# Altium PCB Inverter.PcbDoc (part 2 of 3)
Units mm, origin at the board's own origin, x right, y up, seen from the top; angles counter-clockwise.
Board outline 150 x 100 mm, 2 copper layers (Top Layer, Bottom Layer), stack 1.74 mm thick; 301 components, 198 nets, 1184 pads, 813 vias.
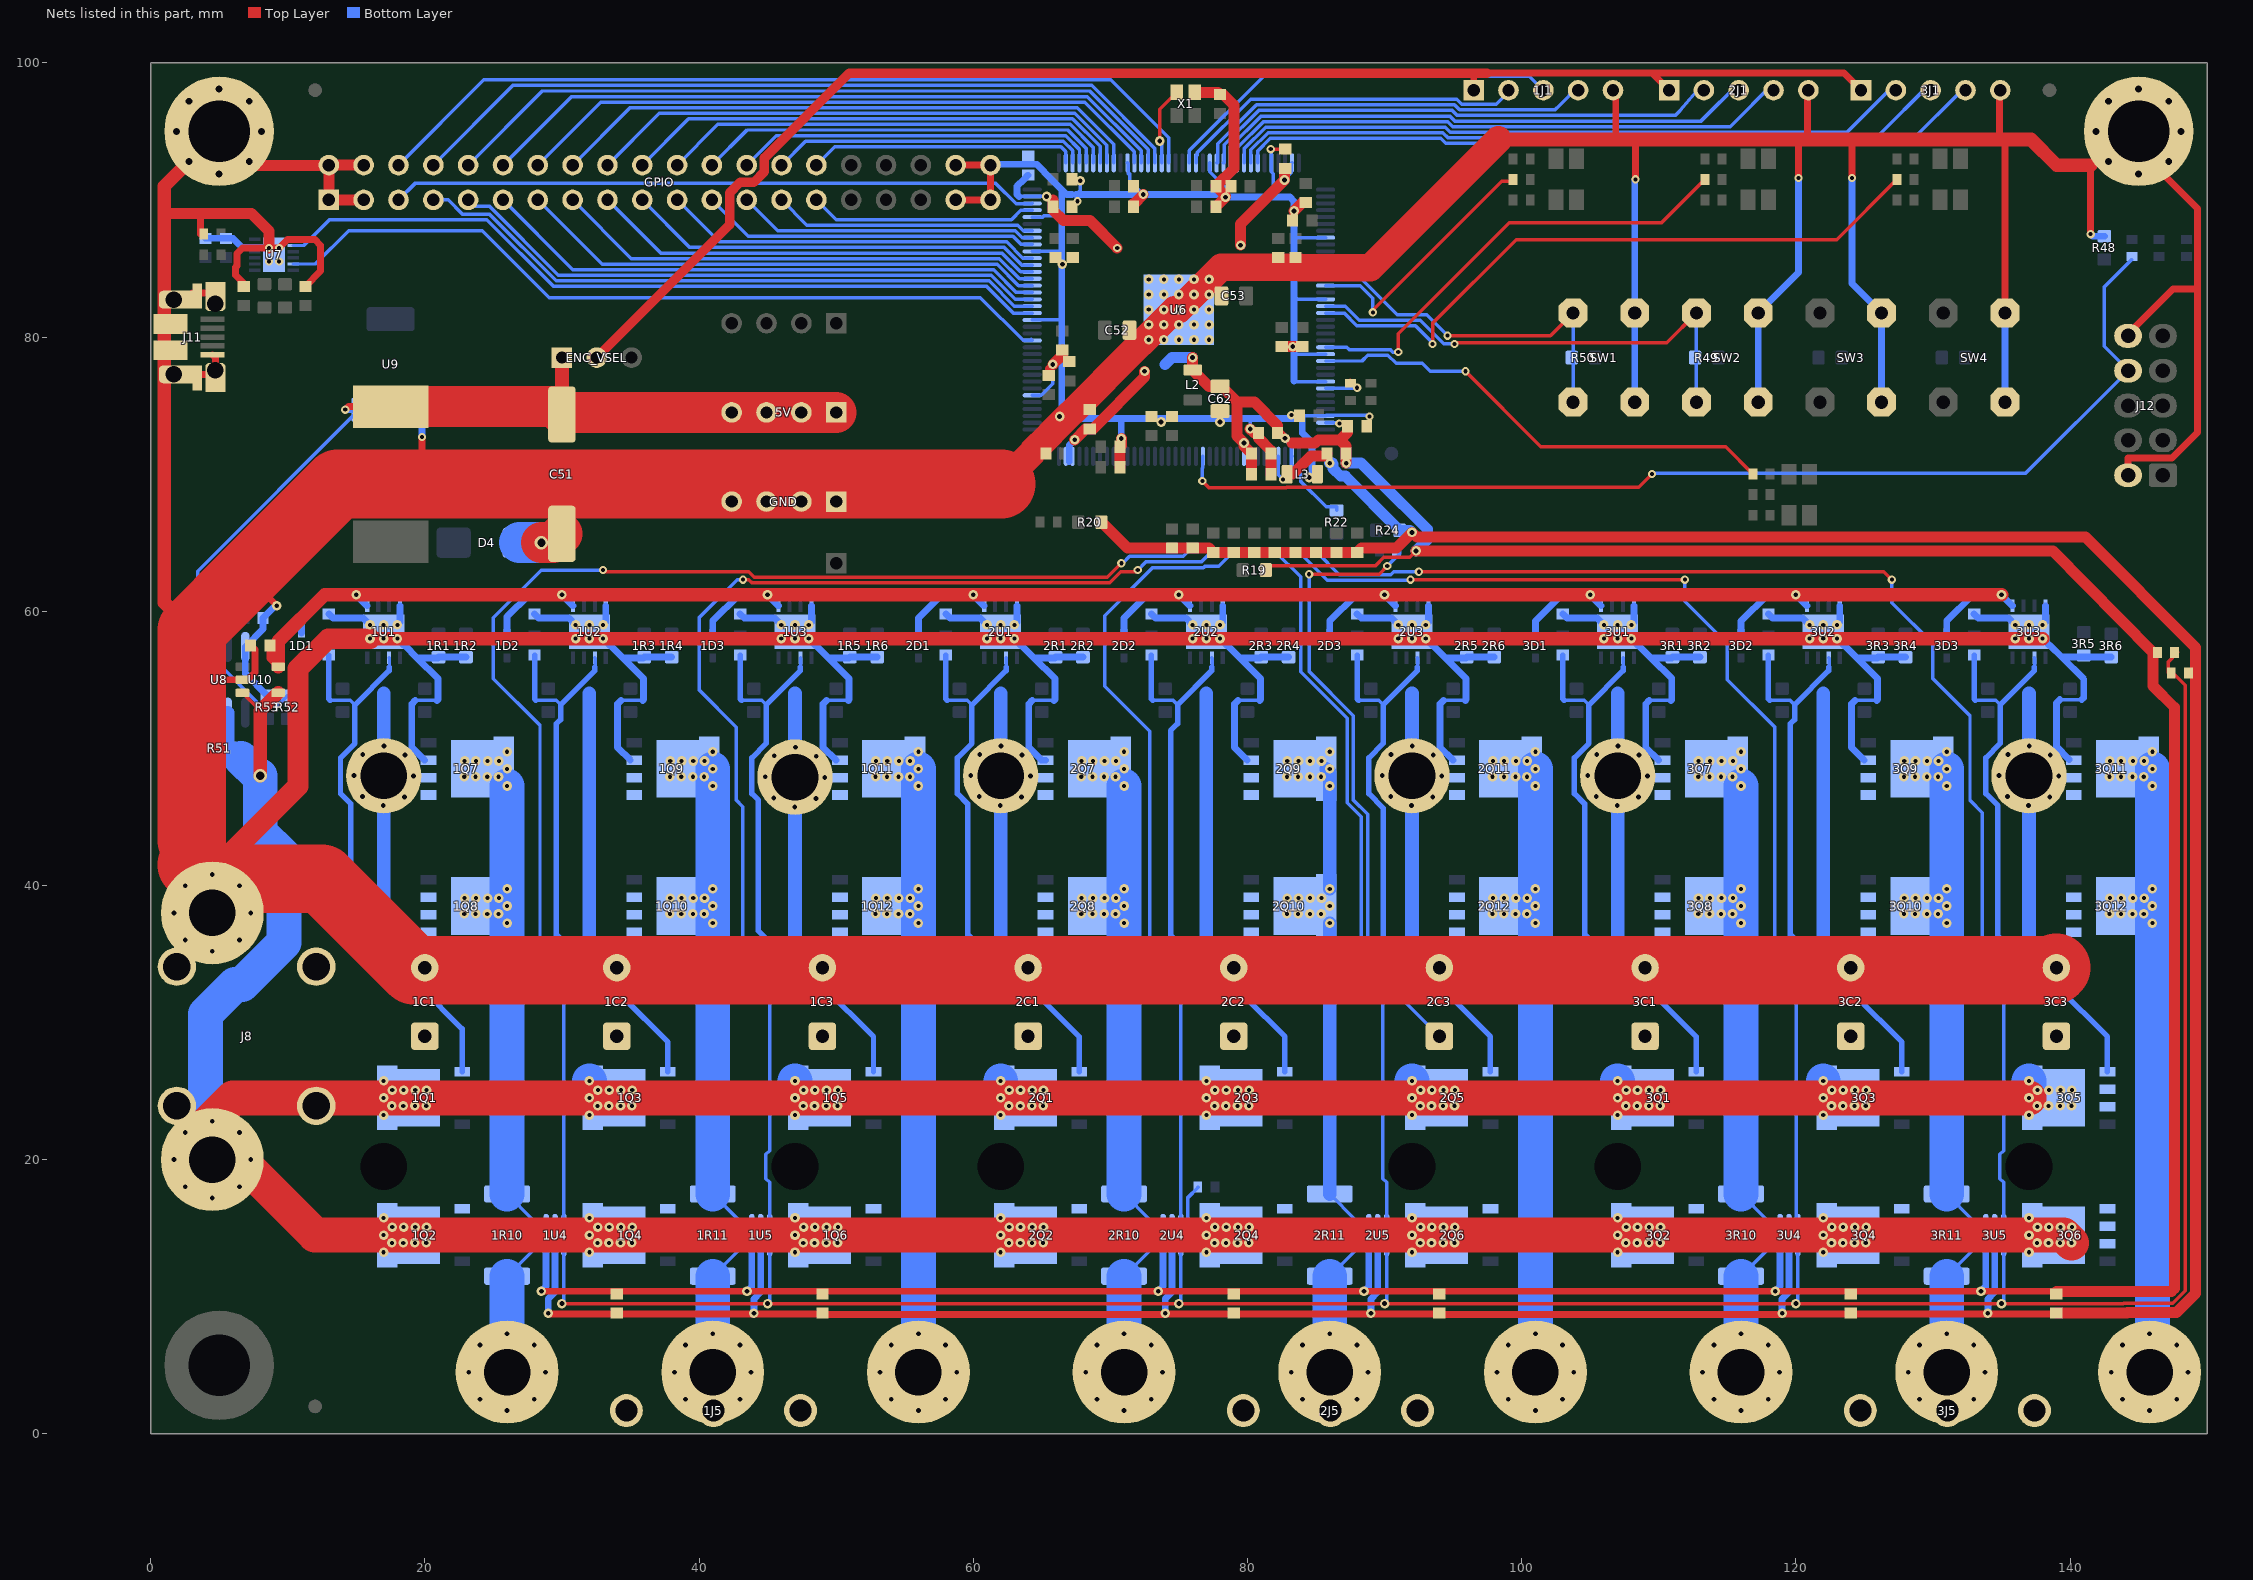
[diagram p2: the nets of this part, all layers, seen from the top]

## Via types
v1: diameter 0.7, hole 0.3, Top Layer to Bottom Layer, 475 vias
v2: diameter 0.7, hole 0.35, Top Layer to Bottom Layer, 233 vias
v3: diameter 0.6, hole 0.3, Top Layer to Bottom Layer, 78 vias
v4: diameter 1.27, hole 0.5, Top Layer to Bottom Layer, 24 vias
v5: diameter 1, hole 0.6, Top Layer to Bottom Layer, 3 vias

## Nets (pads, with @x,y where several pads share a name; then routed paths per layer and width w, separated by ;. In a path a pad name is that pad's centre, name@x,y a point inside that pad or via, vN(x,y) a via of type N, cw(c..) or ccw(c..) an arc to the next point about the centre after c; other vN are vias at no path point)
1.65VREF: 1U4.1 1U5.1 2U4.1 2U5.1 3U4.1 3U5.1 R54.1 R55.2 | length 190
  Top Layer w0.254: v2(30,9.5) v2(45,9.5) v2(75,9.5) v2(90,9.5) v2(120,9.5) v2(135,9.5) 143.887,9.5 143.917,9.529 147.49,9.529 148.4,10.439 148.4,54.6 147.5,55.5 147.15,55.5 147.15,56.3 R54.1@147.85,57
  Bottom Layer w0.254: v2(30,9.5) 30.15,9.65 1U4.1@30.15,13.375 ; v2(45,9.5) 45.15,9.65 1U5.1@45.15,13.375 ; v2(75,9.5) 75.15,9.65 2U4.1@75.15,13.375 ; v2(90,9.5) 90.15,9.65 2U5.1@90.15,13.375 ; v2(120,9.5) 120.15,9.65 3U4.1@120.15,13.375 ; v2(135,9.5) 135.15,9.65 3U5.1@135.15,13.375
1PH_A: 1A.1 1J5.1 1R10.1 1U4.5 | length 12.6
  Bottom Layer w0.254: 1R10.1@26,11.5 29.5,15 1U4.5@29.5,15.625
  Bottom Layer w2.54: 1A.1@26,4.5 v2(26,7.3) 1R10.1@26,11.5
  other v2: 26,1.7 24.02,2.52 27.98,2.52 23.2,4.5 28.8,4.5 24.02,6.48 27.98,6.48
1PH_A_Q: 1C4.1 1Q1.S 1Q2.S 1Q7.D 1Q8.D 1R10.2 1U1.6 1U4.4 | length 77.3
  Bottom Layer w0.254: 13.1,53.5 14.573,53.5 14.9,53.173 ; 17.396,55.904 17.424,55.932 17.424,56.581 1U1.6@17.4,56.605 ; 1R10.2@26,17.5 27.875,15.625 1U4.4@28.85,15.625
  Bottom Layer w0.4: 1C4.1@13,56.8 13,53.6 13.1,53.5 ; 17.396,55.904 17.396,55.669 14.9,53.173 14.9,50.355 13.85,49.305 13.85,46.695 14.6,45.945 14.6,36.42 18.42,32.6 19.668,32.6 22.725,29.543 1Q1.S@22.725,26.405
  Bottom Layer w2.54: 1R10.2@26,17.5 v1(26,37.25) ; v1(26,47.25) v1(26,39.75) ; v1(26,37.25) 26,37.925 v1(26,38.5) ; v1(26,37.25) v1(26,38.5) ; v1(26,38.5) v1(26,39.75) ; v1(26,38.5) 26,39.075 v1(26,39.75)
  other v1: 22.875,37.925 23.7,37.925 24.55,37.925 25.375,37.925 22.9,39.075 23.725,39.075 24.575,39.075 25.4,39.075 22.875,47.925 23.7,47.925 24.55,47.925 25.375,47.925 26,48.5 22.9,49.075 23.725,49.075 24.575,49.075 25.4,49.075 26,49.75
1PH_B: 1B.1 1J5.2 1R11.1 1U5.5 | length 12.6
  Bottom Layer w0.254: 1R11.1@41,11.5 44.5,15 1U5.5@44.5,15.625
  Bottom Layer w2.54: 1B.1@41,4.5 v2(41,7.3) 1R11.1@41,11.5
  other v2: 41,1.7 39.02,2.52 42.98,2.52 38.2,4.5 43.8,4.5 39.02,6.48 42.98,6.48
1PH_B_Q: 1C5.1 1Q3.S 1Q4.S 1Q9.D 1Q10.D 1R11.2 1U2.6 1U5.4 | length 77.9
  Bottom Layer w0.254: 28.1,53.5 29.573,53.5 29.9,53.173 ; 32.396,55.904 32.424,55.932 32.424,56.581 1U2.6@32.4,56.605 ; 1R11.2@41,17.5 42.875,15.625 1U5.4@43.85,15.625
  Bottom Layer w0.4: 1C5.1@28,56.8 28,53.6 28.1,53.5 ; 32.396,55.904 32.396,55.669 29.9,53.173 29.9,52.1 29.6,51.8 29.6,36.42 34.12,31.9 34.4,31.9 37.725,28.575 1Q3.S@37.725,26.405
  Bottom Layer w2.54: 1R11.2@41,17.5 v1(41,38.5) ; v1(41,37.25) v1(41,38.5) ; 1Q10.D@41,37.925 v1(41,38.5) ; v1(41,39.75) v1(41,38.5) ; v1(41,48.5) v1(41,47.25) v1(41,38.5)
  other v1: 37.875,37.925 38.7,37.925 39.55,37.925 40.375,37.925 37.9,39.075 38.725,39.075 39.575,39.075 40.4,39.075 37.875,47.925 38.7,47.925 39.55,47.925 40.375,47.925 37.9,49.075 38.725,49.075 39.575,49.075 40.4,49.075 41,49.75
1PH_C: 1C6.1 1C.1 1J5.3 1Q5.S 1Q6.S 1Q11.D 1Q12.D 1U3.6 | length 85
  Bottom Layer w0.254: 43.1,53.5 44.573,53.5 44.9,53.173 ; 47.396,55.904 47.424,55.932 47.424,56.581 1U3.6@47.4,56.605
  Bottom Layer w0.4: 1C6.1@43,56.8 43,53.6 43.1,53.5 ; 47.396,55.904 47.396,55.669 44.9,53.173 44.9,50.355 43.85,49.305 43.85,46.695 44.327,46.218 44.327,36.693 48.42,32.6 49.09,32.6 52.725,28.965 1Q5.S@52.725,26.405
  Bottom Layer w2.54: 1C.1@56,4.5 v1(56,48.5)
  other v1: 56,37.25 52.875,37.925 53.7,37.925 54.55,37.925 55.375,37.925 56,38.5 52.9,39.075 53.725,39.075 54.575,39.075 55.4,39.075 56,39.75 56,47.25 52.875,47.925 53.7,47.925 54.55,47.925 55.375,47.925 52.9,49.075 53.725,49.075 54.575,49.075 55.4,49.075 56,49.75
  other v2: 56,1.7 54.02,2.52 57.98,2.52 53.2,4.5 58.8,4.5 54.02,6.48 57.98,6.48 56,7.3
2PH_A: 2A.1 2J5.1 2R10.1 2U4.5 | length 12.6
  Bottom Layer w0.254: 2R10.1@71,11.5 74.5,15 2U4.5@74.5,15.625
  Bottom Layer w2.54: 2A.1@71,4.5 v2(71,7.3) 2R10.1@71,11.5
  other v2: 71,1.7 69.02,2.52 72.98,2.52 68.2,4.5 73.8,4.5 69.02,6.48 72.98,6.48
2PH_A_Q: 2C4.1 2Q1.S 2Q2.S 2Q7.D 2Q8.D 2R10.2 2U1.6 2U4.4 | length 129.4
  Bottom Layer w0.254: 58.1,53.5 59.573,53.5 59.9,53.173 ; 62.396,55.904 62.424,55.932 62.424,56.581 2U1.6@62.4,56.605 ; 2R10.2@71,17.5 72.875,15.625 2U4.4@73.85,15.625
  Bottom Layer w0.4: 2C4.1@58,56.8 58,53.6 58.1,53.5 ; 62.396,55.904 62.396,55.669 59.9,53.173 59.9,50.355 58.85,49.305 58.85,46.695 59.6,45.945 59.6,36.42 63.42,32.6 64.09,32.6 67.725,28.965 2Q1.S@67.725,26.405
  Bottom Layer w2.54: 2R10.2@71,17.5 v1(71,37.25) ; v1(71,47.25) v1(71,39.75) ; v1(71,37.25) v1(71,38.5) ; v1(71,37.25) 2Q8.D@71,37.925 ; v1(71,37.25) v1(71,38.5) ; v1(71,37.25) v1(71,38.5) ; v1(71,37.25) 2Q8.D@71,37.925 ; v1(71,37.25) 2Q8.D@71,37.925 ; v1(71,37.25) 2Q8.D@71,37.925 ; v1(71,37.25) v1(71,38.5) ; v1(71,37.25) v1(71,38.5) ; v1(71,37.25) v1(71,38.5) ; v1(71,37.25) v1(71,38.5) ; v1(71,37.25) v1(71,38.5) ; v1(71,37.25) v1(71,38.5) ; v1(71,37.25) v1(71,38.5) ; v1(71,37.25) v1(71,38.5) ; v1(71,37.25) 2Q8.D@71,37.925 ; v1(71,37.25) 2Q8.D@71,37.925 ; v1(71,37.25) 2Q8.D@71,37.925 ; v1(71,37.25) 2Q8.D@71,37.925 ; v1(71,37.25) v1(71,38.5) ; v1(71,37.25) v1(71,38.5) ; v1(71,37.25) v1(71,38.5) ; v1(71,37.25) 2Q8.D@71,37.925 ; 2Q8.D@71,37.925 v1(71,38.5) ; 2Q8.D@71,37.925 v1(71,38.5) ; 2Q8.D@71,37.925 v1(71,38.5) ; 2Q8.D@71,37.925 v1(71,38.5) ; 2Q8.D@71,37.925 v1(71,38.5) ; 2Q8.D@71,37.925 v1(71,38.5) ; 2Q8.D@71,37.925 v1(71,38.5) ; 2Q8.D@71,37.925 v1(71,38.5) ; 2Q8.D@71,37.925 v1(71,38.5) ; v1(71,38.5) v1(71,39.75) ; v1(71,38.5) v1(71,39.75) ; v1(71,38.5) v1(71,39.75) ; v1(71,38.5) v1(71,39.75) ; v1(71,38.5) v1(71,39.75) ; v1(71,38.5) v1(71,39.75) ; v1(71,38.5) 2Q8.D@71,39.075 ; v1(71,38.5) 2Q8.D@71,39.075 ; v1(71,38.5) v1(71,39.75) ; v1(71,38.5) v1(71,39.75) ; v1(71,38.5) v1(71,39.75) ; v1(71,38.5) v1(71,39.75) ; v1(71,38.5) v1(71,39.75) ; v1(71,38.5) 2Q8.D@71,39.075 ; v1(71,38.5) 2Q8.D@71,39.075 ; v1(71,38.5) 2Q8.D@71,39.075 ; v1(71,38.5) 2Q8.D@71,39.075 ; v1(71,38.5) 2Q8.D@71,39.075 ; v1(71,38.5) 2Q8.D@71,39.075 ; v1(71,38.5) v1(71,39.75) ; v1(71,38.5) v1(71,39.75) ; v1(71,38.5) v1(71,39.75) ; v1(71,38.5) 2Q8.D@71,39.075 ; 2Q8.D@71,39.075 v1(71,39.75) ; 2Q8.D@71,39.075 v1(71,39.75) ; 2Q8.D@71,39.075 v1(71,39.75) ; 2Q8.D@71,39.075 v1(71,39.75) ; 2Q8.D@71,39.075 v1(71,39.75) ; 2Q8.D@71,39.075 v1(71,39.75) ; 2Q8.D@71,39.075 v1(71,39.75) ; 2Q8.D@71,39.075 v1(71,39.75) ; 2Q8.D@71,39.075 v1(71,39.75)
  other v1: 67.875,37.925 68.7,37.925 69.55,37.925 70.375,37.925 67.9,39.075 68.725,39.075 69.575,39.075 70.4,39.075 67.875,47.925 68.7,47.925 69.55,47.925 70.375,47.925 71,48.5 67.9,49.075 68.725,49.075 69.575,49.075 70.4,49.075 71,49.75
2PH_B: 2B.1 2J5.2 2R11.1 2U5.5 | length 12.6
  Bottom Layer w0.254: 2R11.1@86,11.5 89.5,15 2U5.5@89.5,15.625
  Bottom Layer w2.54: 2B.1@86,4.5 v2(86,7.3) 2R11.1@86,11.5
  other v2: 86,1.7 84.02,2.52 87.98,2.52 83.2,4.5 88.8,4.5 84.02,6.48 87.98,6.48
2PH_B_Q: 2C5.1 2Q3.S 2Q4.S 2Q9.D 2Q10.D 2R11.2 2U2.6 2U5.4 | length 72.9
  Bottom Layer w0.254: 73.1,53.5 74.573,53.5 74.9,53.173 ; 77.396,55.904 77.424,55.932 77.424,56.581 2U2.6@77.4,56.605 ; 2R11.2@86,17.5 87.875,15.625 2U5.4@88.85,15.625
  Bottom Layer w0.4: 2C5.1@73,56.8 73,53.6 73.1,53.5 ; 77.396,55.904 77.396,55.669 74.9,53.173 74.9,51.8 74.4,51.3 74.4,36.4 79,31.8 79.89,31.8 82.725,28.965 2Q3.S@82.725,26.405
  Bottom Layer w1: 2Q9.D@85.75,48.5 86,48.25 v1(86,47.25) v1(86,39.75) ; 2R11.2@86,17.5 v1(86,37.25)
  other v1: 82.875,37.925 83.7,37.925 84.55,37.925 85.375,37.925 86,38.5 82.9,39.075 83.725,39.075 84.575,39.075 85.4,39.075 82.875,47.925 83.7,47.925 84.55,47.925 85.375,47.925 86,48.5 82.9,49.075 83.725,49.075 84.575,49.075 85.4,49.075 86,49.75
2PH_C: 2C6.1 2C.1 2J5.3 2Q5.S 2Q6.S 2Q11.D 2Q12.D 2U3.6 | length 118.1
  Bottom Layer w0.254: 88.1,53.5 89.573,53.5 89.9,53.173 ; 92.396,55.904 92.424,55.932 92.424,56.581 2U3.6@92.4,56.605
  Bottom Layer w0.4: 2C6.1@88,56.8 88,53.6 88.1,53.5 ; 92.396,55.904 92.396,55.669 89.9,53.173 89.9,50.355 88.85,49.305 88.85,46.695 89.9,45.645 89.9,35.6 93.5,32 94.69,32 97.725,28.965 2Q5.S@97.725,26.405
  Bottom Layer w2.54: v1(101,37.25) 2C.1@101,4.5 v1(101,48.5)
  other v1: 97.875,37.925 98.7,37.925 99.55,37.925 100.375,37.925 101,38.5 97.9,39.075 98.725,39.075 99.575,39.075 100.4,39.075 101,39.75 101,47.25 97.875,47.925 98.7,47.925 99.55,47.925 100.375,47.925 97.9,49.075 98.725,49.075 99.575,49.075 100.4,49.075 101,49.75
  other v2: 101,1.7 99.02,2.52 102.98,2.52 98.2,4.5 103.8,4.5 99.02,6.48 102.98,6.48 101,7.3
3PH_A: 3A.1 3J5.1 3R10.1 3U4.5 | length 12.6
  Bottom Layer w0.254: 3R10.1@116,11.5 119.5,15 3U4.5@119.5,15.625
  Bottom Layer w2.54: 3A.1@116,4.5 v2(116,7.3) 3R10.1@116,11.5
  other v2: 116,1.7 114.02,2.52 117.98,2.52 113.2,4.5 118.8,4.5 114.02,6.48 117.98,6.48
3PH_A_Q: 3C4.1 3Q1.S 3Q2.S 3Q7.D 3Q8.D 3R10.2 3U1.6 3U4.4 | length 74.4
  Bottom Layer w0.254: 103.1,53.5 104.573,53.5 104.9,53.173 ; 107.396,55.904 107.424,55.932 107.424,56.581 3U1.6@107.4,56.605 ; 3R10.2@116,17.5 117.875,15.625 3U4.4@118.85,15.625
  Bottom Layer w0.4: 3C4.1@103,56.8 103,53.6 103.1,53.5 ; 107.396,55.904 107.396,55.669 104.9,53.173 104.9,50.355 103.85,49.305 103.85,46.695 104.6,45.945 104.6,36.42 108.42,32.6 109.09,32.6 112.725,28.965 3Q1.S@112.725,26.405
  Bottom Layer w2.54: 3R10.2@116,17.5 v1(116,47.25)
  other v1: 116,37.25 112.875,37.925 113.7,37.925 114.55,37.925 115.375,37.925 116,38.5 112.9,39.075 113.725,39.075 114.575,39.075 115.4,39.075 116,39.75 112.875,47.925 113.7,47.925 114.55,47.925 115.375,47.925 116,48.5 112.9,49.075 113.725,49.075 114.575,49.075 115.4,49.075 116,49.75
3PH_B: 3B.1 3J5.2 3R11.1 3U5.5 | length 12.6
  Bottom Layer w0.254: 3R11.1@131,11.5 134.5,15 3U5.5@134.5,15.625
  Bottom Layer w2.54: 3B.1@131,4.5 v2(131,7.3) 3R11.1@131,11.5
  other v2: 131,1.7 129.02,2.52 132.98,2.52 128.2,4.5 133.8,4.5 129.02,6.48 132.98,6.48
3PH_B_Q: 3C5.1 3Q3.S 3Q4.S 3Q9.D 3Q10.D 3R11.2 3U2.6 3U5.4 | length 76.6
  Bottom Layer w0.254: 118.1,53.5 119.573,53.5 119.9,53.173 ; 122.396,55.904 122.424,55.932 122.424,56.581 3U2.6@122.4,56.605 ; 3R11.2@131,17.5 132.875,15.625 3U5.4@133.85,15.625
  Bottom Layer w0.4: 3C5.1@118,56.8 118,53.6 118.1,53.5 ; 122.396,55.904 122.396,55.669 119.9,53.173 119.9,52.1 119.6,51.8 119.6,36.42 124.12,31.9 124.4,31.9 127.725,28.575 3Q3.S@127.725,26.405
  Bottom Layer w2.54: 3R11.2@131,17.5 v1(131,38.5) ; v1(131,37.25) v1(131,38.5) ; 3Q10.D@131,37.925 v1(131,38.5) ; v1(131,48.5) v1(131,38.5)
  other v1: 127.875,37.925 128.7,37.925 129.55,37.925 130.375,37.925 127.9,39.075 128.725,39.075 129.575,39.075 130.4,39.075 131,39.75 131,47.25 127.875,47.925 128.7,47.925 129.55,47.925 130.375,47.925 127.9,49.075 128.725,49.075 129.575,49.075 130.4,49.075 131,49.75
3PH_C: 3C6.1 3C.1 3J5.3 3Q5.S 3Q6.S 3Q11.D 3Q12.D 3U3.6 | length 89.5
  Bottom Layer w0.254: 133.1,53.5 134.573,53.5 134.9,53.173 ; 137.396,55.904 137.424,55.932 137.424,56.581 3U3.6@137.4,56.605
  Bottom Layer w0.4: 3C6.1@133,56.8 133,53.6 133.1,53.5 ; 137.396,55.904 137.396,55.669 134.9,53.173 134.9,50.355 133.85,49.305 133.85,46.695 134.727,45.818 134.727,36.293 138.42,32.6 139.09,32.6 142.725,28.965 3Q5.S@142.725,26.405
  Bottom Layer w2.54: 3C.1@146,4.5 v1(146,37.25) ; 3Q11.D@146,47.925 v1(146,47.25) ; v1(146,37.25) v1(146,38.5) ; v1(146,37.25) 146,37.925 v1(146,38.5) ; v1(146,38.5) 146,39.075 v1(146,39.75) ; v1(146,38.5) v1(146,39.75) ; v1(146,39.75) v1(146,47.25) ; v1(146,47.25) v1(146,48.5) v1(146,47.25)
  other v1: 142.875,37.925 143.7,37.925 144.55,37.925 145.375,37.925 142.9,39.075 143.725,39.075 144.575,39.075 145.4,39.075 142.875,47.925 143.7,47.925 144.55,47.925 145.375,47.925 142.9,49.075 143.725,49.075 144.575,49.075 145.4,49.075 146,49.75
  other v2: 145.8,1.7 143.82,2.52 147.78,2.52 143,4.5 148.6,4.5 143.82,6.48 147.78,6.48 145.8,7.3
5V: 5V.1 5V.2 5V.3 5V.4 C51.1 ENC_VSEL.1 L1.1 R52.1 U9.3 | length 71.6
  Top Layer w0.5: v3(14.2,74.7) 14.425,74.925 L1.1@17.5,74.925
  Top Layer w1: C51.1@30,74.35 29.625,74.725 30,75.1 ENC_VSEL.1@30,78
  Top Layer w3: L1.1@17.5,74.925 C51.1@29.425,74.925 ; C51.1@30,74.35 30.15,74.5 5V.4@42.38,74.5 5V.3@44.92,74.5 5V.2@47.46,74.5 5V.1@50,74.5
  Bottom Layer w0.254: R52.1@10,53.85 9.271,53.121 7.95,53.121 7.721,53.35 7.721,53.404 5.104,56.021 4.125,56.021 3.686,56.46 3.686,59.023 3.428,59.281 3.428,62.928 U9.3@15.2,74.7
  Bottom Layer w0.5: v3(14.2,74.7) U9.3@15.2,74.7
12V: 1C7.2 1C8.2 1C9.2 1D1.A 1D2.A 1D3.A 1U1.1 1U2.1 1U3.1 2C7.2 2C8.2 2C9.2 2D1.A 2D2.A 2D3.A 2U1.1 2U2.1 2U3.1 3C7.2 3C8.2 3C9.2 3D1.A 3D2.A 3D3.A 3U1.1 3U2.1 3U3.1 C64.2 U10.5 | length 192.9
  Top Layer w0.5: C64.2@8.7,57.5 8.7,56.55 U10.5@9.3,55.95
  Top Layer w1: U10.5@9.3,55.95 9.3,57.8 12.7,61.2 v2(14.995,61.2) v2(29.995,61.2) v2(44.995,61.2) v2(59.995,61.2) v2(74.995,61.2) v2(89.995,61.2) v2(104.995,61.2) v2(119.995,61.2) v2(134.995,61.2)
  Bottom Layer w0.5: 1D1.A@11,58.4 11,59.5 12.7,61.2 1C7.2@13,61.2 v2(14.995,61.2) 1U1.1@15.8,60.395 ; 1D2.A@26,58.4 26,59.6 27.6,61.2 v2(29.995,61.2) 1U2.1@30.8,60.395 ; 1D3.A@41,58.4 41,59.3 42.9,61.2 v2(44.995,61.2) 1U3.1@45.8,60.395 ; 2D1.A@56,58.4 56,59.5 57.85,61.35 58.029,61.171 59.966,61.171 v2(59.995,61.2) 2U1.1@60.8,60.395 ; 2D2.A@71,58.4 71,59.5 72.85,61.35 73.029,61.171 74.966,61.171 v2(74.995,61.2) 2U2.1@75.8,60.395 ; 2D3.A@86,58.4 86,59.286 87.914,61.2 v2(89.995,61.2) 2U3.1@90.8,60.395 ; 3D1.A@101,58.4 101,59.286 102.914,61.2 v2(104.995,61.2) 3U1.1@105.8,60.395 ; 3D2.A@116,58.4 116,59.286 117.914,61.2 v2(119.995,61.2) 3U2.1@120.8,60.395 ; 3D3.A@131,58.4 131,59.3 132.9,61.2 v2(134.995,61.2) 3U3.1@135.8,60.395
\CTS: U6.50 U7.11 | length 58.3
  Bottom Layer w0.254: U7.11@10.415,85.325 12.019,85.325 14.446,87.751 24.194,87.751 29.071,82.875 60.518,82.875 63.643,79.75 U6.50@64.3,79.75 U6.50@64.229,79.821
\RTS: U6.54 U7.8 | length 57.5
  Bottom Layer w0.254: U7.8@10.415,86.675 11.156,86.675 13.045,88.564 24.531,88.564 29.407,83.687 60.988,83.687 62.925,81.75 U6.54@64.3,81.75
AGND: 1C10.1 1C11.1 1U4.2 1U5.2 2C10.1 2C11.1 2U4.2 2U5.2 3C10.1 3C11.1 3U4.2 3U5.2 C12.1 C13.1 C14.1 C15.1 C16.1 C17.1 C18.1 C19.1 C20.1 C21.1 C63.1 L3.1 R20.1 R21.1 R24.1 R55.1 U6.4 | length 301.4
  Top Layer w0.254: C63.1@85.8,71.5 85.8,71 v2(86,70.8)
  Top Layer w0.5: v2@29,8.748 1C11.1@49,8.748 ; 1C11.1@49,8.8 1C11.1@49,8.748 ; L3.1@82.9,70 L3.1@83.3,70 ; 2C11.1@94,8.7 v2@119,8.7 ; 2C11.1@94,8.748 74,8.748 74,8.7 49,8.7 1C11.1@49,8.748 ; v2@119,8.748 3C11.1@139,8.748
  Top Layer w0.8: R20.1@69.35,66.5 71.25,64.6 C21.1@74.5,64.6 C20.1@76,64.6 77.2,64.6 C19.1@77.5,64.3 C18.1@79,64.3 C17.1@80.5,64.3 C16.1@82,64.3 C15.1@83.5,64.3 C14.1@85,64.3 C12.1@86.5,64.3 C13.1@88,64.3 88.306,64.606 90.856,64.606 v2(92,65.75) 92.35,65.4 141.115,65.4 149.15,57.365 149.15,10.228 147.772,8.85 144.198,8.85 144.148,8.8 3C11.1@139,8.8 ; L3.1@83.3,70 84.62,71.32 85.62,71.32 C63.1@85.8,71.5
  Bottom Layer w0.254: 2U4.2@74.5,13.375 74.5,14.062 75.629,15.192 75.629,17.204 76.4,17.975 R21.1@76.375,18 ; U6.4@82.25,71.3 82.25,69.95 v3(82.6,69.6)
  Bottom Layer w0.5: v2(29,8.8) 29,9.836 29.5,10.336 1U4.2@29.5,13.375 ; v2(44,8.8) 44,9.836 44.5,10.336 1U5.2@44.5,13.375 ; v2(74,8.8) 74,9.836 74.5,10.336 2U4.2@74.5,13.375 ; v2(89,8.8) 89,9.836 89.5,10.336 2U5.2@89.5,13.375 ; v2(119,8.8) 119,9.836 119.5,10.336 3U4.2@119.5,13.375 ; v2(134,8.8) 134,9.836 134.5,10.336 3U5.2@134.5,13.375
  Bottom Layer w0.8: v2(86,70.8) 86.2,70.8 86.248,70.752 86.248,70.406 86.806,69.848 87.152,69.848 R24.1@91.1,65.9 91.85,65.9 v2(92,65.75)
AVCC: 1C10.2 1C11.2 1U4.3 1U5.3 2C10.2 2C11.2 2U4.3 2U5.3 3C10.2 3C11.2 3U4.3 3U5.3 C24.2 C25.2 C44.2 C46.2 C47.2 C48.2 C49.2 C50.2 C62.2 C63.2 L2.1 R19.2 R22.2 R54.2 U6.2 U6.9 U6.34 U6.35 U6.71 U6.107 U6.143 | length 329.7
  Top Layer w0.254: R19.2@81.35,63 81.677,63.327 89.34,63.327 89.94,63.927 91.827,63.927 v2(92.3,64.4)
  Top Layer w0.5: v2(28.5,10.4) v2(43.5,10.4) v2(73.5,10.4) 2C11.2@94,10.4 ; C50.2@82.45,73 82.835,72.615 82.833,72.613 v2(82.748,72.613) ; v2(88.5,10.4) 2C11.2@94,10.4 ; 3C11.2@139,10.4 v2(133.5,10.4) v2(118.5,10.4) 2C11.2@94,10.4
  Top Layer w0.8: 65.8,90 65.8,89.269 66.571,88.498 68.502,88.498 v3(70.5,86.5) ; v2(67.4,72.5) 68.2,73.3 C46.2@68.5,73.3 68.731,73.3 72.5,77.069 v2(72.5,77.5) ; v2(76,78.5) L2.1@76,77.6 77.2,76.4 C62.2@78,76.4 78.108,76.4 79.252,75.256 ; v2(79.5,86.7) 79.5,88.25 v2(82.7,91.45) 82.7,92.25 C48.2@82.75,92.3 ; C24.2@80.3,70 C25.2@80.3,71.5 79.75,72.05 v2(79.75,72.273) 79.248,72.775 79.248,73.694 79.252,73.699 79.252,75.256 ; C50.2@82.2,73 82.2,73.555 80.499,75.256 79.252,75.256 ; 83.25,72.273 84.941,72.273 85.171,72.502 86.752,72.502 ; v2(87.2,70.8) C63.2@87.2,71.5 87.2,72.055 86.752,72.502 ; C49.2@87.3,73.5 87.3,73.05 86.752,72.502 ; v2(92.3,64.4) 138.75,64.4 146.05,57 146.05,54.545 147.6,52.995 147.6,10.6 147.4,10.4 3C11.2@139,10.4
  Bottom Layer w0.254: 63.35,90.25 U6.71@64.3,90.25 v2(65.35,90.25) ; v2(82.7,91.45) 82.7,91.493 83.179,91.972 83.179,92.629 U6.107@83.25,92.7 ; v2(82.748,72.613) 82.748,72.459 83.179,72.028 83.179,71.371 U6.2@83.25,71.3 83.179,71.229 83.179,70.713 83.871,70.022 83.871,69.489 85.749,67.611 86.5,67.611 R22.2@86.5,67.35 ; U6.143@85.7,73.75 86.65,73.75 v3(86.7,73.7)
  Bottom Layer w0.5: v2(28.5,10.4) 28.848,10.748 1U4.3@28.848,13.375 ; v2(43.5,10.4) 43.848,10.748 1U5.3@43.848,13.373 ; 63.35,90.25 63.198,90.402 63.198,90.998 C47.2@63.7,91.5 ; C47.2@63.7,91.5 C47.2@64,91.8 ; 67,70.9 67,72.1 v2(67.4,72.5) ; v2(73.5,10.4) 73.848,10.748 2U4.3@73.848,13.375 ; v2(88.5,10.4) 88.848,10.748 2U5.3@88.848,13.373 ; v2(118.5,10.4) 118.848,10.748 3U4.3@118.848,13.375 ; v2(133.5,10.4) 133.848,10.748 3U5.3@133.848,13.373
  Bottom Layer w0.8: 74,78 74.5,78.5 v2(76,78.5) ; v2(87.2,70.8) 88.287,70.8 89.618,69.469 89.628,69.469 93.118,65.979 93.118,65.218 v2(92.3,64.4)
BOOT_SEL: R49.1 SW2.2 U6.126 | length 35.7
  Top Layer w0.254: v3(95.1,79.5) 95.179,79.579 110.579,79.579 SW2.2@112.75,81.75
  Bottom Layer w0.254: U6.126@85.7,82.25 87.121,82.25 88.15,81.221 92.599,81.221 94.319,79.5 v3(95.1,79.5) ; SW2.2@112.75,75.25 112.75,78.4 R49.1@112.65,78.5 112.75,78.6 SW2.2@112.75,81.75
CLK_50: U6.88 X1.3 | length 5.7
  Top Layer w0.254: v2(73.6,94.3) 73.6,96.6 X1.3@74.85,97.85
  Bottom Layer w0.254: v2(73.6,94.3) 73.75,94.15 U6.88@73.75,92.7
CONF_DONE: R46.1 U6.138 | length 3.1
  Top Layer w0.254: R46.1@87.5,76.85 88,76.35 v3(88,76.3)
  Bottom Layer w0.254: U6.138@85.7,76.25 87.95,76.25 v3(88,76.3)
CRC_ERROR: R39.2 U6.134 | length 34.9
  Top Layer w0.254: v3(95.9,77.5) 101.4,72 114.875,72 R39.2@116.875,70
  Bottom Layer w0.254: U6.134@85.7,78.25 88.356,78.25 88.785,78.679 90.24,78.679 90.84,78.079 92.74,78.079 93.319,77.5 v3(95.9,77.5)
DCBUS: 1C1.1 1C2.1 1C3.1 1Q1.D 1Q2.D 1Q3.D 1Q4.D 1Q5.D 1Q6.D 2C1.1 2C2.1 2C3.1 2Q1.D 2Q2.D 2Q3.D 2Q4.D 2Q5.D 2Q6.D 3C1.1 3C2.1 3C3.1 3Q1.D 3Q2.D 3Q3.D 3Q4.D 3Q5.D 3Q6.D DC+.1 J8.1 R23.2 R51.2 U8.6 U10.3 U10.4 | length 365.2
  Top Layer w0.254: U10.3@6.7,54.05 8,52.75 ; v3(84.5,62.7) 89.6,62.7 v3(90.2,63.3)
  Top Layer w1: v5(8,48) 8,52.75 U10.4@9.3,54.05
  Top Layer w2.54: v1(137,24.5) 6,24.5 4,22.5 12,14.5 139.525,14.5 v1(140.1,13.925)
  Bottom Layer w0.254: v3(84.5,62.7) 84.5,55.6 87.723,52.377 87.723,46.228 88.773,45.178 88.773,34.227 2C3.1@94,29 ; v3(90.2,63.3) 91.1,64.2 R23.2@91.1,64.4
  Bottom Layer w0.5: v5@7.85,48 v5(8,48)
  Bottom Layer w1: U8.6@5.635,52.6 5.635,50.215 R51.2@5.85,50
  Bottom Layer w2.54: DC+.1@4,22.5 4,30.618 6.162,32.78 6.662,32.78 9.72,35.838 9.72,42.162 8,43.882 v5(8,48) ; 6.6,49.25 v5@7.85,48 ; 1Q3.D@32,25.075 v1(32,25.75) ; 1Q5.D@47,25.075 v1(47,25.75) ; 2Q1.D@62,25.075 v1(62,25.75) ; 2Q5.D@92,25.075 v1(92,25.75) ; 3Q1.D@107,25.075 v1(107,25.75) ; 3Q3.D@122,25.075 3Q3.D@122,25.75 ; 3Q5.D@137,25.075 v1(137,25.75)
  other v1: 17,13.25 32,13.25 47,13.25 62,13.25 77,13.25 92,13.25 107,13.25 122,13.25 137,13.25 17.6,13.925 18.425,13.925 19.275,13.925 20.1,13.925 32.6,13.925 33.425,13.925 34.275,13.925 35.1,13.925 47.6,13.925 48.425,13.925 49.275,13.925 50.1,13.925 62.6,13.925 63.425,13.925 64.275,13.925 65.1,13.925 77.6,13.925 78.425,13.925 79.275,13.925 80.1,13.925 92.6,13.925 93.425,13.925 94.275,13.925 95.1,13.925 107.6,13.925 108.425,13.925 109.275,13.925 110.1,13.925 122.6,13.925 123.425,13.925 124.275,13.925 125.1,13.925 137.6,13.925 138.425,13.925 139.275,13.925 17,14.5 32,14.5 47,14.5 62,14.5 77,14.5 92,14.5 107,14.5 122,14.5 137,14.5 17.625,15.075 18.45,15.075 19.3,15.075 20.125,15.075 32.625,15.075 33.45,15.075 34.3,15.075 35.125,15.075 47.625,15.075 48.45,15.075 49.3,15.075 50.125,15.075 62.625,15.075 63.45,15.075 64.3,15.075 65.125,15.075 77.625,15.075 78.45,15.075 79.3,15.075 80.125,15.075 92.625,15.075 93.45,15.075 94.3,15.075 95.125,15.075 107.625,15.075 108.45,15.075 109.3,15.075 110.125,15.075 122.625,15.075 123.45,15.075 124.3,15.075 125.125,15.075 137.625,15.075 138.45,15.075 139.3,15.075 140.125,15.075 17,15.75 32,15.75 47,15.75 62,15.75 77,15.75 92,15.75 107,15.75 122,15.75 137,15.75 17,23.25 32,23.25 47,23.25 62,23.25 77,23.25 92,23.25 107,23.25 122,23.25 137,23.25 17.6,23.925 18.425,23.925 19.275,23.925 20.1,23.925 32.6,23.925 33.425,23.925 34.275,23.925 35.1,23.925 47.6,23.925 48.425,23.925 49.275,23.925 50.1,23.925 62.6,23.925 63.425,23.925 64.275,23.925 65.1,23.925 77.6,23.925 78.425,23.925 79.275,23.925 80.1,23.925 92.6,23.925 93.425,23.925 94.275,23.925 95.1,23.925 107.6,23.925 108.425,23.925 109.275,23.925 110.1,23.925 122.6,23.925 123.425,23.925 124.275,23.925 125.1,23.925 137.6,23.925 138.425,23.925 139.275,23.925 140.1,23.925 17,24.5 32,24.5 47,24.5 62,24.5 77,24.5 92,24.5 107,24.5 122,24.5 17.625,25.075 18.45,25.075 19.3,25.075 20.125,25.075 32.625,25.075 33.45,25.075 34.3,25.075 35.125,25.075 47.625,25.075 48.45,25.075 49.3,25.075 50.125,25.075 62.625,25.075 63.45,25.075 64.3,25.075 65.125,25.075 77.625,25.075 78.45,25.075 79.3,25.075 80.125,25.075 92.625,25.075 93.45,25.075 94.3,25.075 95.125,25.075 107.625,25.075 108.45,25.075 109.3,25.075 110.125,25.075 122.625,25.075 123.45,25.075 124.3,25.075 125.125,25.075 137.625,25.075 138.45,25.075 139.3,25.075 140.125,25.075 17,25.75 77,25.75 122,25.75
  other v2: 4.5,17.2 2.52,18.02 6.48,18.02 1.7,20 7.3,20 2.52,21.98 6.48,21.98 4.5,22.8
DEV_OE: R50.1 SW1.2 U6.122 | length 27
  Top Layer w0.254: v3(94.6,80.1) 102.1,80.1 SW1.2@103.75,81.75
  Bottom Layer w0.254: U6.122@85.7,84.25 88.312,84.25 90.935,81.627 93.073,81.627 v3(94.6,80.1) ; SW1.2@103.75,75.25 103.75,78.4 R50.1@103.65,78.5 103.75,78.6 SW1.2@103.75,81.75
ENC_A1: 1J1.2 U6.93 | length 25.8
  Bottom Layer w0.254: U6.93@76.25,92.7 76.25,93.273 76.321,93.273 76.321,93.428 80.23,97.337 95.268,97.337 95.634,96.971 98.134,96.971 99.04,97.877 1J1.2@99.04,98
ENC_A2: 2J1.2 U6.97 | length 38.2
  Bottom Layer w0.254: U6.97@78.25,92.7 78.321,92.7 78.321,94.014 80.831,96.524 94.931,96.524 95.298,96.158 111.198,96.158 111.564,96.524 2J1.2@112.99,98.2
ENC_A3: 3J1.2 U6.100 | length 50.4
  Bottom Layer w0.254: U6.100@79.75,92.7 79.75,93.719 81.336,95.305 94.426,95.305 94.793,94.939 123.729,94.939 124.095,95.305 3J1.2@126.99,98.2
ENC_B1: 1J1.3 U6.92 | length 29.4
  Bottom Layer w0.254: U6.92@75.75,92.7 75.75,93.602 81.178,99.029 100.551,99.029 1J1.3@101.58,98
ENC_B2: 2J1.3 U6.98 | length 40
  Bottom Layer w0.254: U6.98@78.75,92.7 78.75,93.868 80.999,96.118 94.763,96.118 95.129,95.751 113.081,95.751 113.448,96.118 2J1.3@115.53,98.2
ENC_B3: 3J1.3 U6.101 | length 52.4
  Bottom Layer w0.254: U6.101@80.25,92.7 80.25,93.644 81.504,94.899 94.258,94.899 94.624,94.532 125.862,94.532 126.229,94.899 3J1.3@129.53,98.2
ENC_V: 1J1.1 2J1.1 3J1.1 ENC_VSEL.2 | length 106.3
  Top Layer w0.5: 1J1.1@96.5,98 96.5,99.248 ; 97.5,99.248 109.502,99.248 ; 2J1.1@110.75,98 109.502,99.248 ; 3J1.1@124.75,98 123.502,99.248 109.502,99.248
  Top Layer w0.7: ENC_VSEL.2@32.54,78.5 42.228,88.188 42.228,90.519 42.996,91.288 43.999,91.288 44.768,92.056 44.768,93.059 50.956,99.248 96.5,99.248 97.5,99.248
ENC_Z1: 1J1.4 U6.96 | length 29.7
  Bottom Layer w0.254: U6.96@77.75,92.7 77.821,92.7 77.821,94.088 80.663,96.931 95.1,96.931 95.466,96.564 102.434,96.564 102.801,96.931 1J1.4@104.07,98.2
ENC_Z2: 2J1.4 U6.99 | length 42
  Bottom Layer w0.254: U6.99@79.25,92.7 79.25,93.794 81.168,95.711 94.595,95.711 94.961,95.345 115.215,95.345 115.581,95.711 2J1.4@118.07,98.2
ENC_Z3: 3J1.4 U6.102 | length 54.7
  Bottom Layer w0.254: U6.102@80.75,92.7 80.75,93.569 81.673,94.492 94.09,94.492 94.456,94.126 128.246,94.126 3J1.4@132.32,98.2
GND: 1C1.2 1C2.2 1C3.2 1C7.1 1C8.1 1C9.1 1HS1.1 1HS2.1 1J1.5 1Q7.S 1Q8.S 1Q9.S 1Q10.S 1Q11.S 1Q12.S 1R1.1 1R2.1 1R3.1 1R4.1 1R5.1 1R6.1 1U1.4 1U1.9 1U2.4 1U2.9 1U3.4 1U3.9 2C1.2 2C2.2 2C3.2 2C7.1 2C8.1 2C9.1 2HS1.1 2HS2.1 2J1.5 2Q7.S 2Q8.S 2Q9.S 2Q10.S 2Q11.S 2Q12.S 2R1.1 2R2.1 2R3.1 2R4.1 2R5.1 2R6.1 2U1.4 2U1.9 2U2.4 2U2.9 2U3.4 2U3.9 3C1.2 3C2.2 3C3.2 3C7.1 3C8.1 3C9.1 3HS1.1 3HS2.1 3J1.5 3Q7.S 3Q8.S 3Q9.S 3Q10.S 3Q11.S 3Q12.S 3R1.1 3R2.1 3R3.1 3R4.1 3R5.1 3R6.1 3U1.4 3U1.9 3U2.4 3U2.9 3U3.4 3U3.9 C22.1 C23.1 C24.1 C25.1 C26.1 C27.1 C28.1 C29.1 C30.1 C31.1 C32.1 C33.1 C34.1 C35.1 C36.1 C37.1 C38.1 C39.1 C40.1 C41.1 C42.1 C43.1 C44.1 C45.1 C46.1 C47.1 C48.1 C49.1 C50.1 C51.2 C52.1 C53.1 C54.1 C55.1 C56.1 C57.1 C58.1 C59.1 C62.1 C64.1 C65.1 C66.1 D4.A DC-.1 GND.1 GND.2 GND.3 GND.4 GPIO.1 GPIO.2 GPIO.3 GPIO.4 GPIO.37 GPIO.38 GPIO.39 GPIO.40 J8.2 J11.5 J11.SH J12.2 J12.10 L3.2 MH2.1 MH3.1 R37.1 R48.1 R53.1 SW1.1 SW2.1 SW3.1 SW4.1 U6.42 U6.53 U6.63 U6.68 U6.83 U6.95 U6.104 U6.116 U6.125 U6.133 U6.137 U6.142 U6.145 U7.5 U7.13 U8.4 U9.1 U10.2 X1.2 | length 1222.3
  Top Layer w0.254: v3(81.7,93.7) C48.1@82.75,93.7
  Top Layer w0.5: J11.SH@2.575,77.275 4.25,77.275 J11.SH@4.725,76.8 J11.SH@4.725,77.575 4.725,78.5 J11.5@4.525,78.7 ; J11.SH@2.575,82.725 3.05,83.2 J11.SH@4.725,83.2 ; 3,55 U10.2@6.7,55 7.075,55 7.602,55.527 7.602,57.198 C64.1@7.3,57.5 ; R37.1@3.65,87.5 3.65,88.95 3.7,89 ; C22.1@6.8,83.7 6.8,83.907 6.198,84.509 6.198,85.091 6.298,85.191 6.298,86.091 6.709,86.502 8.623,86.502 v3(8.625,86.5) v3(9.375,86.5) 9.977,87.102 11.991,87.102 12.402,86.691 12.402,84.802 C23.1@11.3,83.7 ; 6.874,62.5 7.1,62.5 v2(9.2,60.4) ; 19.8,69.277 v3(19.8,72.7) ; GPIO.37@58.72,90 GPIO.39@61.26,90 GPIO.40@61.26,92.54 GPIO.38@58.72,92.54 ; C28.1@65.5,77.2 65.5,77.7 v2(65.8,78) ; 1J1.5@106.86,98.2 106.86,94.442 106.9,94.402 ; 108,94.402 108.3,94.102 v3(108.3,91.5) ; v3(120.2,91.6) 120.2,94.402 ; 2J1.5@120.86,98.2 120.86,94.442 120.9,94.402 ; v3(124.1,91.6) 124.1,94.302 124.2,94.402 ; 3J1.5@134.86,98.2 134.86,94.542 135,94.402 135.25,94.152 SW4.1@135.25,81.75 ; v3(141.5,87.5) 141.5,92.525 MH3.1@143.975,95 ; MH3.1@142.525,92.525 146.139,92.525 149.3,89.364 149.3,83.5 ; J12.2@144.23,69.92 144.23,71.186 147.439,71.186 149.3,73.047 149.3,83.5 ; J12.10@144.23,80.08 144.23,80.224 147.506,83.5 149.3,83.5
  Top Layer w0.8: 1,89 3.7,89 7.365,89 8.625,87.74 v3(8.625,86.5) ; MH2.1@7.475,92.525 12.985,92.525 GPIO.2@13,92.54 ; GPIO.3@15.54,90 GPIO.1@13,90 GPIO.2@13,92.54 ; GPIO.4@15.54,92.54 GPIO.2@13,92.54 ; v2(65.8,78) 66.5,78.7 C56.1@66.5,79.05 ; C35.1@70.7,70.5 C27.1@70.7,72 70.8,72.1 v2(70.8,72.6) ; C39.1@71.7,89.75 71.75,89.75 v2(72.4,90.4) ; X1.2@76.15,97.85 77.85,97.85 C65.1@78,97.7 78.231,97.7 79.002,96.929 79.002,92.302 C32.1@77.7,91 v2@78.4,90.3 ; C40.1@77.7,89.5 v2(78.4,90.2) ; v2(80.2,73.3) 80.5,73 C50.1@80.8,73 80.8,72.631 81.7,71.731 C25.1@81.7,71.5 C24.1@81.7,70 ; C41.1@82.5,79.3 v2(83.3,79.3) C33.1@84,79.3 ; v2(83.4,89.2) 84,89.8 C58.1@84.25,89.8
  Top Layer w1: MH2.1@2.525,92.525 1,91 1,89 1,60.626 3,58.626 ; v1(16,58) v1(17,58) v1(18,58) v1(31,58) v1(32,58) v1(33,58) v1(61,58) v1(62,58) v1(63,58) v1(91,58) v1(92,58) v1(93,58) v1(106,58) v1(107,58) v1(108,58) v1(121,58) v1(122,58) v1(123,58) v1(136,58) v1(137,58) v1(138,58) ; 98.302,94.402 106.9,94.402 108,94.402 120.2,94.402 120.9,94.402 124.2,94.402 135,94.402 137.148,94.402 139.025,92.525 141.5,92.525
  Top Layer w1.5: DC-.1@4,40.5 10.75,47.25 10.75,55.801 12.949,58 v1(16,58)
  Top Layer w2: 62.053,69.277 64.247,71.472 64.247,71.543 65.648,72.943 65.648,72.967 68.628,75.948 68.643,75.948 69.552,76.857 69.552,76.872 74.681,82 v1(75,82) 78.098,85.098 83.807,85.098 83.857,85.048 88.948,85.048 98.302,94.402
  Top Layer w3: v5(28.5,65) 29.35,65 C51.2@30,65.65
  Top Layer w5: 3,41.5 4,40.5 12.5,40.5 19.2,33.8 138.8,33.8 3C3.2@139,34 ; 3,43.3 3,55 3,58.626 6.874,62.5 13.651,69.277 19.8,69.277 62.053,69.277
  Bottom Layer w0.254: 6.5,86.7 6.525,86.675 U7.5@7.585,86.675 8.45,86.675 v3(8.625,86.5) ; 19.3,53.5 20.9,53.5 ; 34.3,53.5 35.9,53.5 ; 49.3,53.5 50.9,53.5 ; 64.3,53.5 65.9,53.5 ; U6.42@64.3,75.75 64.957,75.75 65.8,76.593 v2(65.8,78) 65.9,78.1 66.45,78.1 ; U6.53@64.3,81.25 66.4,81.25 66.45,81.3 ; U6.63@64.3,86.25 66.4,86.25 66.45,86.3 ; U6.68@64.3,88.75 65.06,88.75 65.139,88.829 66.379,88.829 66.45,88.9 ; v3(67.6,89.9) 67.5,90 67.5,90.4 67.8,90.7 v2(67.8,91.4) ; U6.83@71.25,92.7 71.321,92.629 71.321,91.893 71.4,91.893 71.4,91.4 v2(72.4,90.4) ; U6.95@77.25,92.7 77.25,92.043 78.4,90.893 v2(78.4,90.2) ; 79.3,53.5 80.9,53.5 ; v2(80.2,73.3) 80.2,74.05 ; v3(81.7,93.7) 81.75,93.65 U6.104@81.75,92.7 81.75,92.043 81.879,91.913 81.879,90.221 81.9,90.2 ; v3(83.2,74.3) 83.25,74.25 U6.142@85.7,74.25 85.729,74.279 88.821,74.279 v3(88.9,74.2) ; 83.4,76.8 83.45,76.75 U6.137@85.7,76.75 ; 83.4,78.7 83.45,78.75 U6.133@85.7,78.75 ; 83.4,83 83.65,82.75 U6.125@85.7,82.75 ; 83.4,87.3 83.471,87.229 85.679,87.229 U6.116@85.7,87.25 ; 94.3,53.5 95.9,53.5 ; 109.3,53.5 110.9,53.5 ; 124.3,53.5 125.9,53.5 ; 139.25,53.55 140.85,53.55
  Bottom Layer w0.5: C45.1@4,87.2 C43.1@5.5,87.2 6,87.2 6.5,86.7 ; R53.1@8.5,53.85 6.905,55.445 U8.4@6.905,57.4 8.2,58.695 C42.1@8.2,59.5 9.1,60.4 v2(9.2,60.4) ; 1C7.1@13,59.8 13.3,59.5 15.5,59.5 v1(16,59) ; 1U1.9@18,58 18.495,57.505 18.536,57.505 19.441,56.6 ; v1(18,59) 18.2,59.2 1U1.4@18.2,60.395 ; 19.3,53.5 19.05,53.25 19.05,50.069 1Q7.S@19.984,49.135 ; v3(19.8,72.7) U9.1@19.8,74.7 ; 20.9,53.5 20.95,53.55 20.95,55.091 19.441,56.6 ; 1R2.1@23,56.65 1R1.1@21,56.65 20.95,56.6 19.441,56.6 ; 1C8.1@28,59.8 28.3,59.5 30.5,59.5 v1(31,59) ; 1U2.9@33,58 33.495,57.505 33.536,57.505 34.441,56.6 ; 1U2.9@33.2,59.2 1U2.4@33.2,60.395 ; 34.3,53.5 34.05,53.25 34.05,50.069 1Q9.S@34.984,49.135 ; 35.9,53.5 35.95,53.55 35.95,55.091 34.441,56.6 ; 1R4.1@38,56.65 1R3.1@36,56.65 35.95,56.6 34.441,56.6 ; 1C9.1@43,59.8 43.3,59.5 45.5,59.5 v1(46,59) ; v1(48,58) 48.495,57.505 48.536,57.505 49.441,56.6 ; 1U3.9@48.2,59.2 1U3.4@48.2,60.395 ; 49.3,53.5 49.05,53.25 49.05,50.069 1Q11.S@49.984,49.135 ; 50.9,53.5 50.95,53.55 50.95,55.091 49.441,56.6 ; 1R6.1@53,56.65 1R5.1@51,56.65 50.95,56.6 49.441,56.6 ; 2C7.1@58,59.8 58.3,59.5 60.5,59.5 v1(61,59) ; GPIO.40@61.26,92.54 61.322,92.602 64.617,92.602 65.198,92.021 65.198,92.009 66.45,90.757 ; 2U1.9@63,58 63.495,57.505 63.536,57.505 64.441,56.6 ; v1(63,59) 63.2,59.2 2U1.4@63.2,60.395 ; 64.3,53.5 64.05,53.25 64.05,50.069 64.984,49.135 2Q7.S@65.275,49.135 ; 65.9,53.5 65.95,53.55 65.95,55.091 64.441,56.6 ; v2(66.3,74.2) v2@66.45,74.05 ; 67.2,90.4 66.807,90.4 66.45,90.757 ; 67.5,90.4 v2(72.4,90.4) 78.2,90.4 v2(78.4,90.2) 81.9,90.2 83.1,90.2 83.4,89.9 v2(83.4,89.2) 83.4,87.3 83.4,83 83.4,78.7 83.4,76.8 ; 2R2.1@68,56.65 2R1.1@66,56.65 65.95,56.6 64.441,56.6 ; v2(70.8,72.6) 70.8,74.05 ; 2C8.1@73,59.8 73.3,59.5 75.5,59.5 v1(76,59) ; v1(78,58) 78.495,57.505 78.536,57.505 79.441,56.6 ; 2U2.9@78.2,59.2 2U2.4@78.2,60.395 ; 79.3,53.5 79.05,53.25 79.05,50.069 2Q9.S@79.984,49.135 ; 80.9,53.5 80.95,53.55 80.95,55.091 79.441,56.6 ; 2R4.1@83,56.65 2R3.1@81,56.65 80.95,56.6 79.441,56.6 ; 83.943,74.05 80.2,74.05 70.8,74.05 ; 83.997,74.05 83.997,73.003 84.709,72.291 84.709,69.959 v2(84.5,69.75) ; 2C9.1@88,59.8 88.3,59.5 90.5,59.5 v1(91,59) ; 2U3.9@93,58 93.495,57.505 93.536,57.505 94.441,56.6 ; 2U3.9@93.2,59.2 2U3.4@93.2,60.395 ; 94.3,53.5 94.05,53.25 94.05,50.069 2Q11.S@94.984,49.135 ; 95.9,53.5 95.95,53.55 95.95,55.091 94.441,56.6 ; 2R6.1@98,56.65 2R5.1@96,56.65 95.95,56.6 94.441,56.6 ; 3C7.1@103,59.8 103.3,59.5 105.5,59.5 v1(106,59) ; 3U1.9@108,58 108.495,57.505 108.536,57.505 109.441,56.6 ; v1(108,59) 108.2,59.2 3U1.4@108.2,60.395 ; SW1.1@108.25,75.25 SW1.1@108.25,81.75 108.25,91.45 v3(108.3,91.5) ; 109.3,53.5 109.05,53.25 109.05,50.069 3Q7.S@109.984,49.135 ; 110.9,53.5 110.95,53.55 110.95,55.091 109.441,56.6 ; 3R2.1@113,56.65 3R1.1@111,56.65 110.95,56.6 109.441,56.6 ; SW2.1@117.25,75.25 SW2.1@117.25,81.75 120.2,84.7 v3(120.2,91.6) ; 3C8.1@118,59.8 118.3,59.5 120.5,59.5 v1(121,59) ; 3U2.9@123,58 123.495,57.505 123.536,57.505 124.441,56.6 ; 3U2.9@123.2,59.2 3U2.4@123.2,60.395 ; v3(124.1,91.6) 124.1,83.9 SW3.1@126.25,81.75 SW3.1@126.25,75.25 ; 124.3,53.5 124.05,53.25 124.05,50.069 3Q9.S@124.984,49.135 ; 125.9,53.5 125.95,53.55 125.95,55.091 124.441,56.6 ; 3R4.1@128,56.65 3R3.1@126,56.65 125.95,56.6 124.441,56.6 ; 3C9.1@133,59.8 133.3,59.5 135.5,59.5 v1(136,59) ; SW4.1@135.25,75.25 SW4.1@135.25,81.75 ; 3U3.9@138,58 138.495,57.505 138.536,57.505 139.391,56.65 ; 3U3.9@138.2,59.2 3U3.4@138.2,60.395 ; 139.25,53.55 139,53.3 139,50.119 3Q11.S@139.934,49.185 ; 140.85,53.55 141,53.7 141,55.041 139.391,56.65 ; v3(141.5,87.5) 141.65,87.35 R48.1@142.5,87.35 ; 3R6.1@143,56.65 139.391,56.65 ; v2@66.45,74.05 66.45,78.1 66.45,81.3 66.45,86.3 66.45,88.9 66.45,90.757 ; v2@66.45,74.05 70.8,74.05
  Bottom Layer w1: 17,54 17,36 1C1.2@19,34 ; 32,54 32,36 1C2.2@34,34 ; 47,54 47,36 1C3.2@49,34 ; 62,54 62,36 2C1.2@64,34 ; 77,54 77,36 2C2.2@79,34 ; 92,54 92,36 2C3.2@94,34 ; 107,54 107,36 3C1.2@109,34 ; 122,54 122,36 3C2.2@124,34 ; 137,54 137,36 3C3.2@139,34
  Bottom Layer w3: D4.A@26.9,65 v5(28.5,65)
  other v1: 46,58 47,58 76,58 77,58 17,59 32,59 33,59 47,59 48,59 62,59 77,59 78,59 92,59 93,59 107,59 122,59 123,59 137,59 138,59 72.8,79.8 73.9,79.8 75,79.8 76.1,79.8 77.2,79.8 72.8,80.9 73.9,80.9 75,80.9 76.1,80.9 77.2,80.9 72.8,82 73.9,82 76.1,82 77.2,82 72.8,83.1 73.9,83.1 75,83.1 76.1,83.1 77.2,83.1 72.8,84.2 73.9,84.2 75,84.2 76.1,84.2 77.2,84.2
  other v2: 4.5,35.2 2.52,36.02 6.48,36.02 1.7,38 7.3,38 2.52,39.98 6.48,39.98 4.5,40.8 46.975,45.725 16.975,45.825 61.975,45.825 91.975,45.825 106.975,45.825 136.975,45.825 48.52,46.344 45.444,46.38 18.52,46.444 63.52,46.444 93.52,46.444 108.52,46.444 138.52,46.444 15.444,46.48 60.444,46.48 90.444,46.48 105.444,46.48 135.444,46.48 49.175,47.875 44.825,47.925 19.175,47.975 64.175,47.975 94.175,47.975 109.175,47.975 139.175,47.975 14.825,48.025 59.825,48.025 89.825,48.025 104.825,48.025 134.825,48.025 48.556,49.42 45.48,49.456 18.556,49.52 63.556,49.52 93.556,49.52 108.556,49.52 138.556,49.52 15.48,49.556 60.48,49.556 90.48,49.556 105.48,49.556 135.48,49.556 47.025,50.075 17.025,50.175 62.025,50.175 92.025,50.175 107.025,50.175 137.025,50.175 73.7,73.8 78,73.8 66.5,85.3
  other v3: 8.625,85.5 9.375,85.5
  other v4: 5,91.9 145,91.9 2.808,92.808 7.192,92.808 142.808,92.808 147.192,92.808 1.9,95 8.1,95 141.9,95 148.1,95 2.808,97.192 7.192,97.192 142.808,97.192 147.192,97.192 5,98.1 145,98.1
GPIO5: GPIO.5 U6.70 | length 47.3
  Bottom Layer w0.254: GPIO.5@18.08,90 19.28,91.2 61.651,91.2 63.131,89.721 64.271,89.721 U6.70@64.3,89.75
GPIO6: GPIO.6 U6.89 | length 62.3
  Bottom Layer w0.254: GPIO.6@18.08,92.54 24.296,98.756 70.034,98.756 74.25,94.54 U6.89@74.25,92.7
GPIO7: GPIO.7 U6.55 | length 46.9
  Bottom Layer w0.254: GPIO.7@20.62,90 21.704,90 22.734,88.971 24.699,88.971 29.576,84.094 61.156,84.094 63,82.25 U6.55@64.3,82.25
GPIO8: GPIO.8 U6.87 | length 58
  Bottom Layer w0.254: GPIO.8@20.62,92.54 26.43,98.35 68.651,98.35 73.25,93.751 U6.87@73.25,92.7
GPIO9: GPIO.9 U6.56 | length 44.1
  Bottom Layer w0.254: GPIO.9@23.16,90 23.634,89.526 24.719,89.526 29.744,84.5 61.324,84.5 63.074,82.75 U6.56@64.3,82.75
GPIO10: GPIO.10 U6.86 | length 54.6
  Bottom Layer w0.254: GPIO.10@23.16,92.54 28.563,97.943 68.483,97.943 72.75,93.676 U6.86@72.75,92.7
GPIO11: GPIO.11 U6.57 | length 41.4
  Bottom Layer w0.254: GPIO.11@25.7,90 30.793,84.907 61.493,84.907 63.149,83.25 U6.57@64.3,83.25
GPIO12: GPIO.12 U6.85 | length 51.2
  Bottom Layer w0.254: GPIO.12@25.7,92.54 30.697,97.537 68.315,97.537 72.25,93.602 U6.85@72.25,92.7
GPIO13: GPIO.13 U6.58 | length 38.6
  Bottom Layer w0.254: GPIO.13@28.24,90 32.927,85.313 61.738,85.313 63.301,83.75 U6.58@64.3,83.75
GPIO14: GPIO.14 U6.84 | length 47.7
  Bottom Layer w0.254: GPIO.14@28.24,92.54 32.831,97.131 68.146,97.131 71.75,93.527 U6.84@71.75,92.7
GPIO15: GPIO.15 U6.59 | length 35.9
  Bottom Layer w0.254: GPIO.15@30.78,90 35.061,85.719 61.906,85.719 63.376,84.25 U6.59@64.3,84.25
GPIO16: GPIO.16 U6.81 | length 43.7
  Bottom Layer w0.254: GPIO.16@30.78,92.54 34.964,96.724 67.576,96.724 70.25,94.05 U6.81@70.25,92.7
GPIO17: GPIO.17 U6.60 | length 33.2
  Bottom Layer w0.254: GPIO.17@33.32,90 37.194,86.126 62.074,86.126 63.45,84.75 U6.60@64.3,84.75
GPIO18: GPIO.18 U6.80 | length 40.2
  Bottom Layer w0.254: GPIO.18@33.32,92.54 37.098,96.318 67.408,96.318 69.75,93.975 U6.80@69.75,92.7
GPIO19: GPIO.19 U6.61 | length 30.4
  Bottom Layer w0.254: GPIO.19@35.86,90 39.328,86.532 62.268,86.532 63.55,85.25 U6.61@64.3,85.25
GPIO20: GPIO.20 U6.79 | length 36.8
  Bottom Layer w0.254: GPIO.20@35.86,92.54 39.231,95.911 67.239,95.911 69.25,93.901 U6.79@69.25,92.7
GPIO21: GPIO.21 U6.62 | length 27.7
  Bottom Layer w0.254: GPIO.21@38.4,90 41.461,86.939 62.436,86.939 63.625,85.75 U6.62@64.3,85.75
GPIO22: GPIO.22 U6.78 | length 33.4
  Bottom Layer w0.254: GPIO.22@38.4,92.54 41.365,95.505 67.071,95.505 68.75,93.826 U6.78@68.75,92.7
GPIO23: GPIO.23 U6.64 | length 24.7
  Bottom Layer w0.254: GPIO.23@40.94,90 43.595,87.345 62.898,87.345 63.493,86.75 U6.64@64.3,86.75
GPIO24: GPIO.24 U6.77 | length 30
  Bottom Layer w0.254: GPIO.24@40.94,92.54 43.499,95.099 66.903,95.099 68.25,93.751 U6.77@68.25,92.7
GPIO25: GPIO.25 U6.65 | length 22
  Bottom Layer w0.254: GPIO.25@43.48,90 45.729,87.751 63.067,87.751 63.568,87.25 U6.65@64.3,87.25
GPIO26: GPIO.26 U6.76 | length 26.6
  Bottom Layer w0.254: GPIO.26@43.48,92.54 45.632,94.692 66.734,94.692 67.75,93.676 U6.76@67.75,92.7
GPIO27: GPIO.27 U6.66 | length 19.2
  Bottom Layer w0.254: GPIO.27@46.02,90 47.862,88.158 63.235,88.158 63.643,87.75 U6.66@64.3,87.75
GPIO28: GPIO.28 U6.75 | length 23.1
  Bottom Layer w0.254: GPIO.28@46.02,92.54 47.766,94.286 66.566,94.286 67.25,93.602 U6.75@67.25,92.7
GPIO29: GPIO.29 U6.69 | length 16.6
  Bottom Layer w0.254: GPIO.29@48.56,90 49.996,88.564 62.787,88.564 63.473,89.25 U6.69@64.3,89.25
GPIO30: GPIO.30 U6.74 | length 19.7
  Bottom Layer w0.254: GPIO.30@48.56,92.54 49.899,93.879 66.398,93.879 66.75,93.527 U6.74@66.75,92.7
IA1: 1U4.6 R32.2 | length 99.6
  Top Layer w0.254: v3(33,63) 33.121,62.879 43.621,62.879 44.029,62.471 69.771,62.471 v3(70.8,63.5)
  Bottom Layer w0.254: 1U4.6@30.15,15.625 30.15,34.25 28.4,36 28.4,51.673 25,55.073 25,59.512 28.488,63 v3(33,63) ; v3(70.8,63.5) 70.9,63.5 71.4,64 75.325,64 R32.2@76,64.675
IA2: 2U4.6 R30.2 | length 57.7
  Bottom Layer w0.254: 2U4.6@75.15,15.625 75.15,33.45 72.867,35.733 72.867,51.248 69.594,54.521 69.594,59.681 73.098,63.186 76.792,63.186 76.892,63.286 77.911,63.286 R30.2@79,64.375
IA3: 3U4.6 R27.2 | length 79.5
  Top Layer w0.254: v3(91.9,62.3) v3(111.9,62.3)
  Bottom Layer w0.254: R27.2@83.5,64.375 83.712,64.375 85.82,62.267 91.867,62.267 v3(91.9,62.3) ; v3(111.9,62.3) 111.9,60.729 115,57.629 115,55 118.473,51.527 118.473,35.953 118.5,35.926 118.5,35.9 120.027,34.373 120.027,15.6 120.052,15.625 3U4.6@120.15,15.625
IB1: 1U5.6 R31.2 | length 86
  Top Layer w0.254: v3(43.2,62.3) 43.625,62.3 43.861,62.064 69.945,62.064 70.76,62.879 71.879,62.879 v3(72,63)
  Bottom Layer w0.254: v3(43.2,62.3) 42.788,62.3 40,59.512 40,54.273 42.723,51.55 42.723,46.228 43.2,45.751 43.2,36.2 45.15,34.25 45.15,20.658 44.873,20.381 44.873,18.619 45.15,18.342 1U5.6@45.15,15.625 ; v3(72,63) 72.592,63.592 76.623,63.592 77.406,64.375 R31.2@77.5,64.375
IB2: 2U5.6 R28.2 | length 52.1
  Bottom Layer w0.254: R28.2@82,64.375 83.873,62.502 83.873,55.585 87.269,52.189 87.269,46.04 88.3,45.009 88.3,34.058 89.873,32.485 89.873,18.619 90.15,18.342 2U5.6@90.15,15.625
IB3: 3U5.6 R26.2 | length 93.3
  Top Layer w0.254: v3(92.5,62.879) 126.421,62.879 v3(127,62.3)
  Bottom Layer w0.254: R26.2@85,64.375 86.702,62.673 90.46,62.673 90.666,62.879 v3(92.5,62.879) ; v3(127,62.3) 127,60.629 130,57.629 130,55.073 132.7,52.373 132.7,46.2 133.6,45.3 133.6,35.8 135.15,34.25 135.15,20.658 134.873,20.381 134.873,18.619 135.15,18.342 3U5.6@135.15,15.625
JTAGEN: J12.8 R43.1 U6.15 | length 82.7
  Top Layer w0.254: v3(76.71,69.5) 77.189,69.021 82.84,69.021 82.851,69.032 108.532,69.032 v3(109.5,70)
  Bottom Layer w0.254: v3(76.71,69.5) 76.71,70.433 76.75,70.473 U6.15@76.75,71.3 ; v3(109.5,70) 109.547,70.047 136.737,70.047 J12.8@144.23,77.54 144.23,77.589 142.5,79.319 142.5,83.65 R43.1@144.5,85.65
LEDB1: 1R17.2 U6.123 | length 19.2
  Top Layer w0.254: v3(89.143,81.8) 89.143,81.962 98.554,91.373 99.248,91.373 1R17.2@99.375,91.5
  Bottom Layer w0.254: U6.123@85.7,83.75 88.215,83.75 89.143,82.822 v3(89.143,81.8)
LEDB2: 2R17.2 U6.132 | length 33.8
  Top Layer w0.254: v3(91,78.9) 91,80.224 99.101,88.326 110.201,88.326 2R17.2@113.375,91.5
  Bottom Layer w0.254: U6.132@85.7,79.25 87.247,79.25 87.412,79.086 90.408,79.086 90.594,78.9 v3(91,78.9)
LEDB3: 3R17.2 U6.127 | length 48.5
  Top Layer w0.254: v3(93.5,79.5) 93.5,81 99.606,87.106 122.981,87.106 3R17.2@127.375,91.5
  Bottom Layer w0.254: U6.127@85.7,81.75 87.046,81.75 87.982,80.814 92.255,80.814 93.5,79.569 v3(93.5,79.5)